# Altium PCB PCB1.pcbdoc
Units mil, origin at the board's own origin, x right, y up, seen from the top; angles counter-clockwise.
Board outline 4437.01 x 4437.01 mil, 4 copper layers (Top Layer, Inner1, Inner2, Bottom Layer); 14 components, 116 nets, 253 pads, 39 vias.
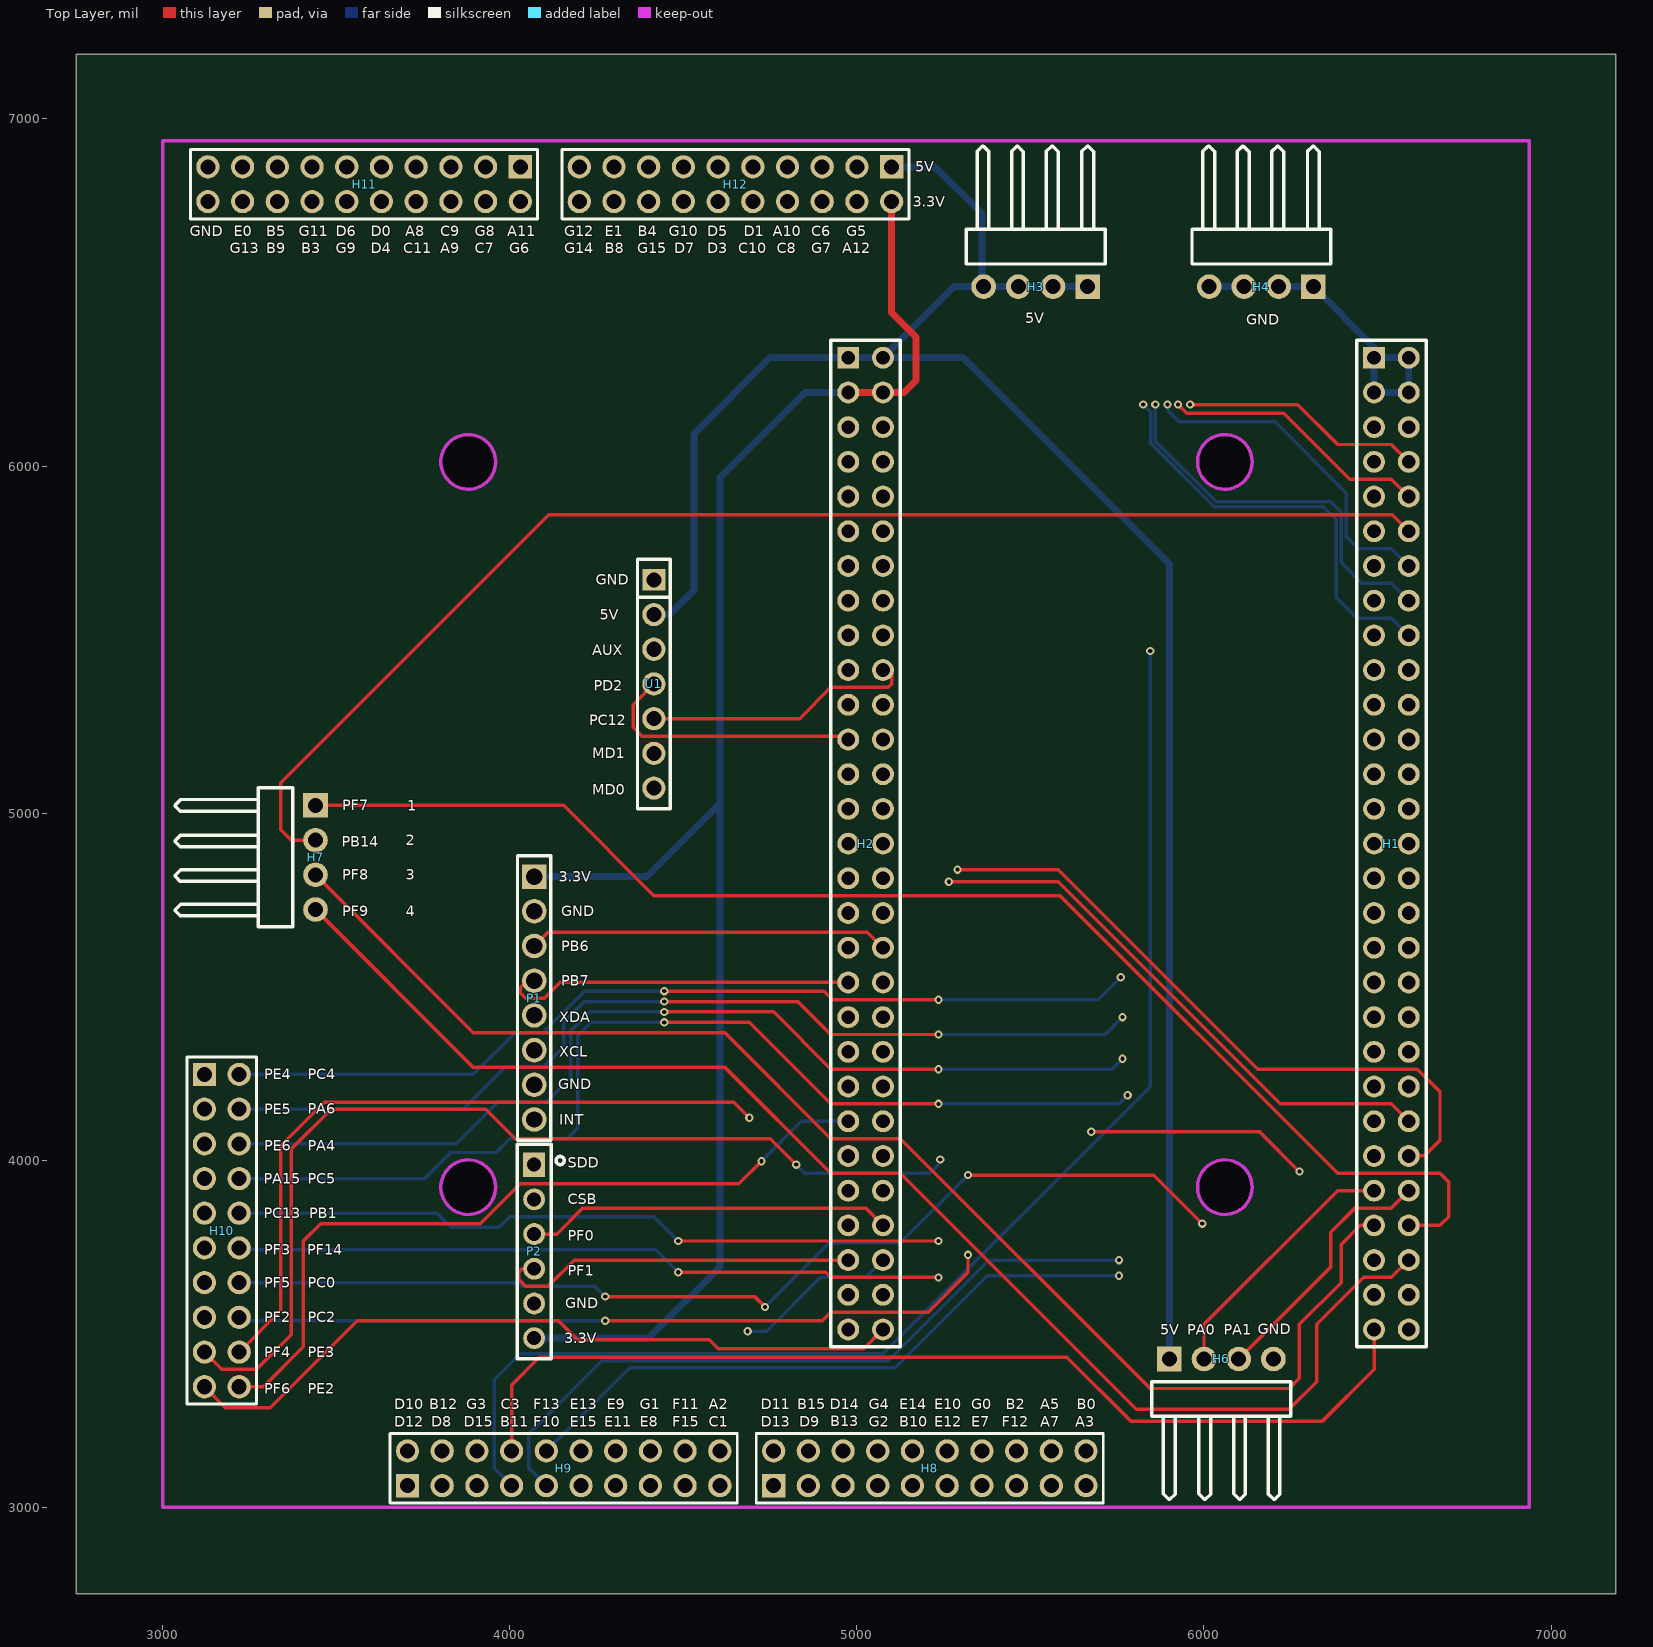
[diagram p0: Top Layer view]
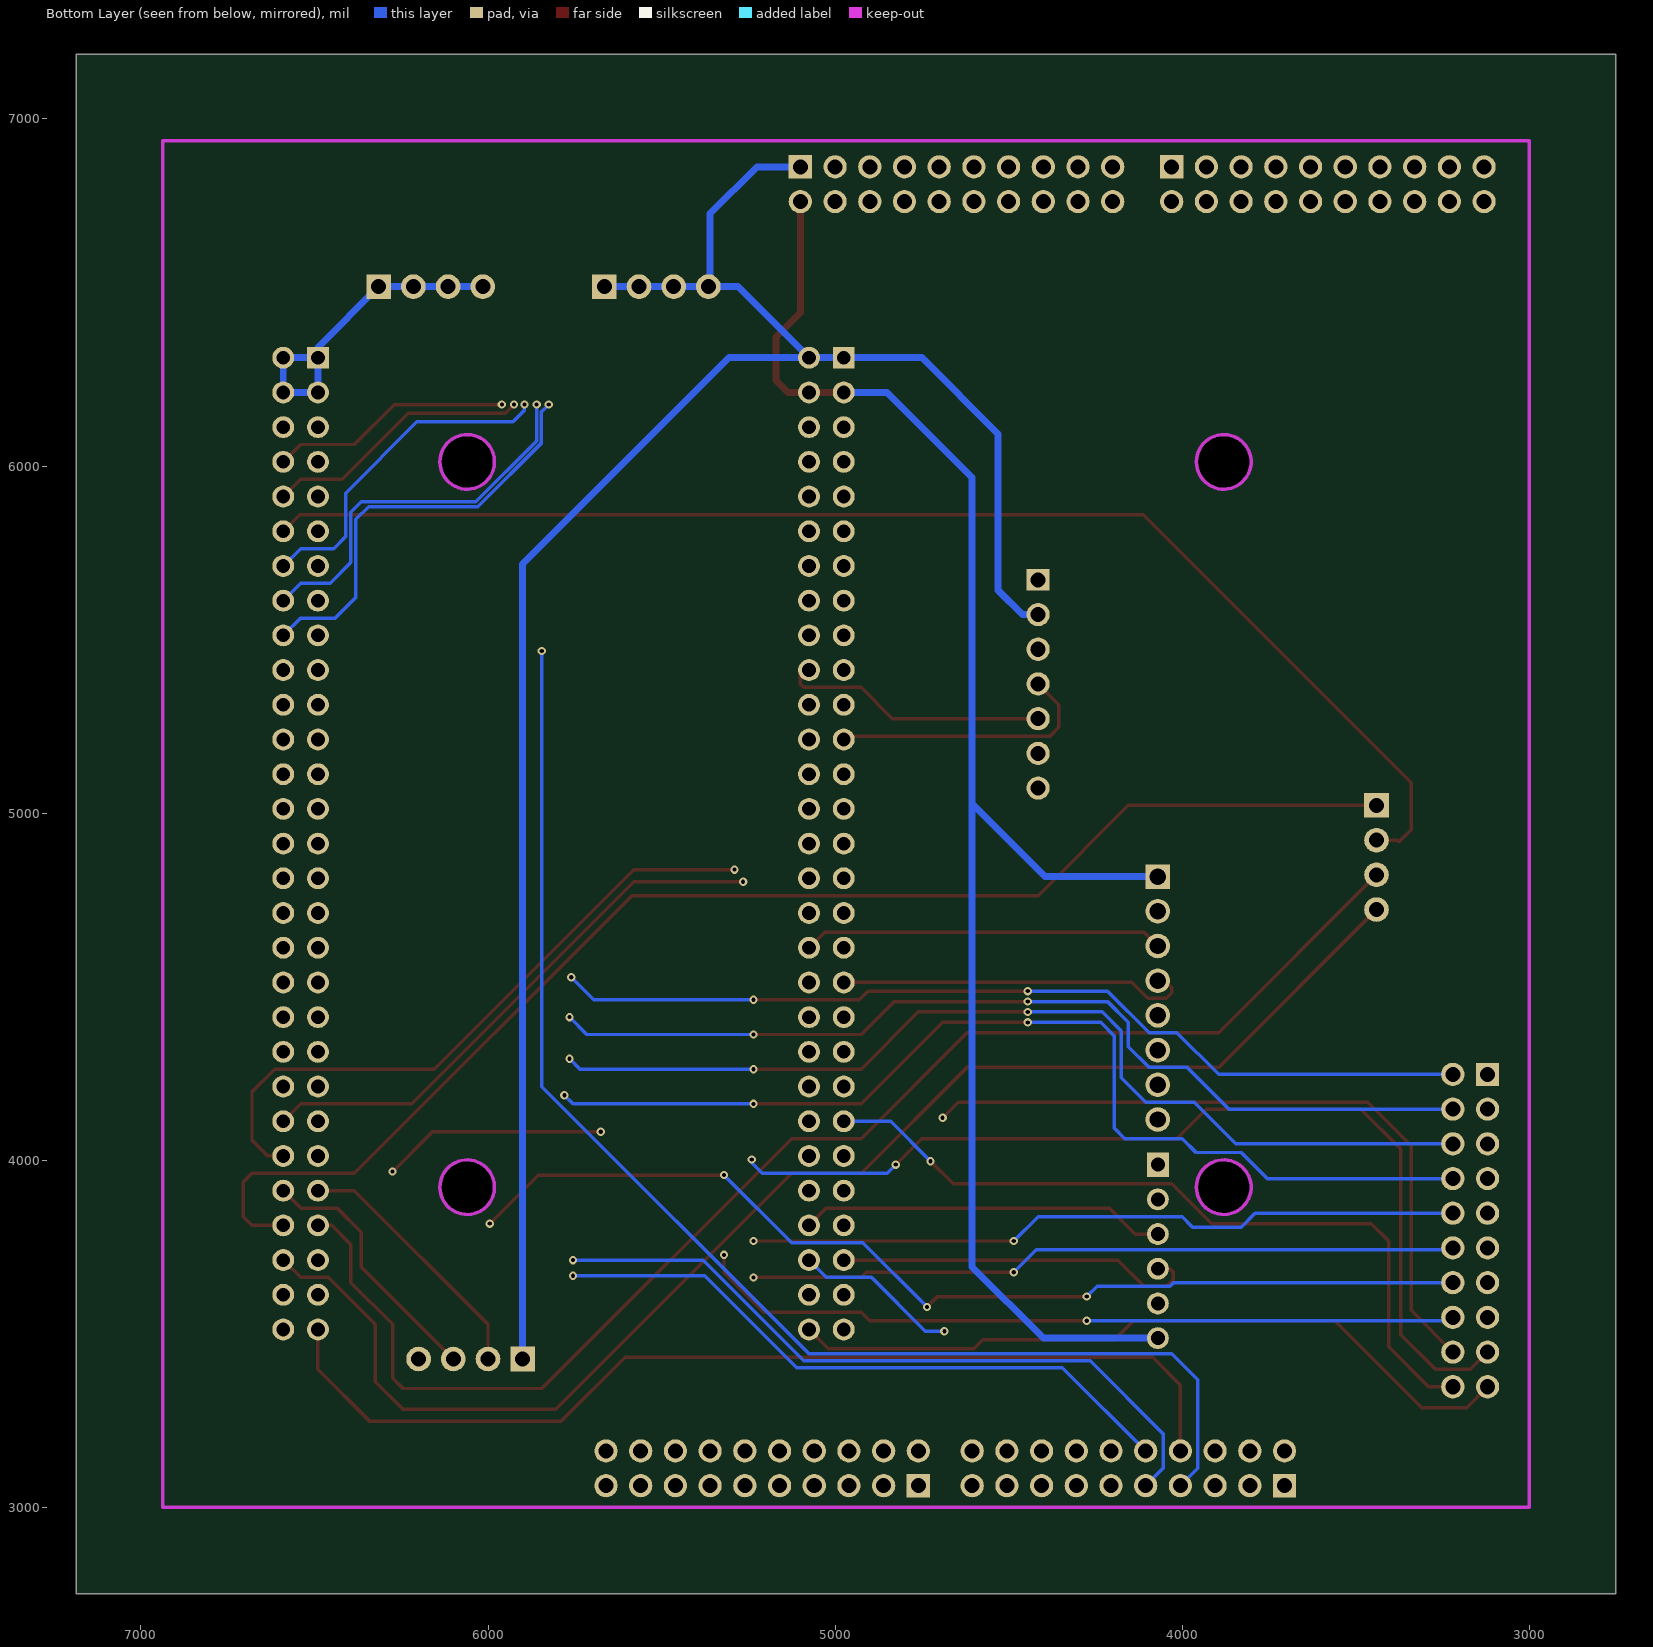
[diagram p1: Bottom Layer view, seen from below]
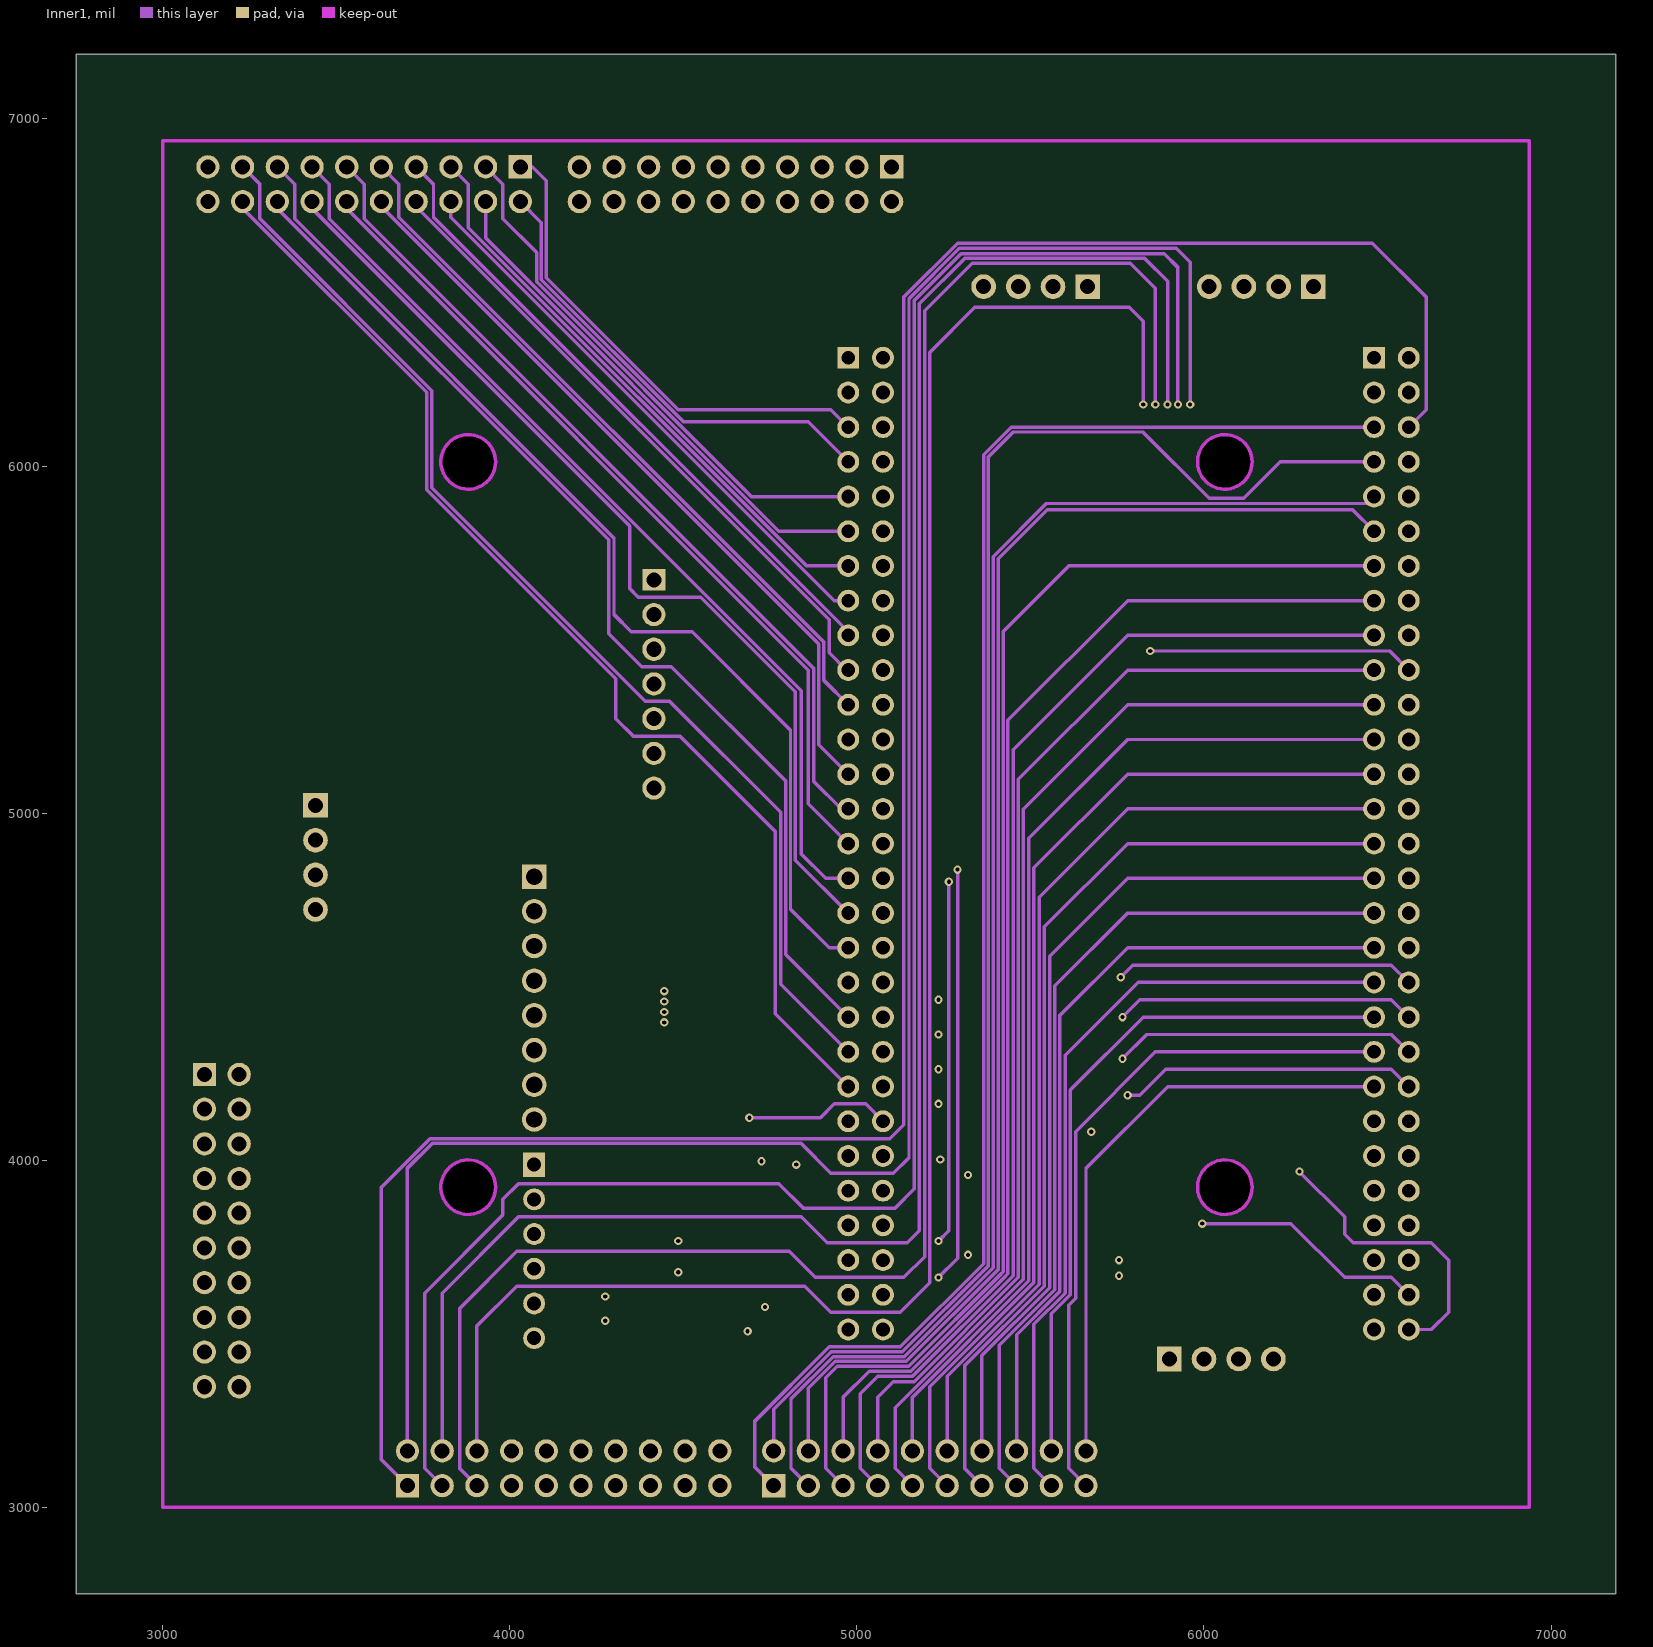
[diagram p2: Inner1]
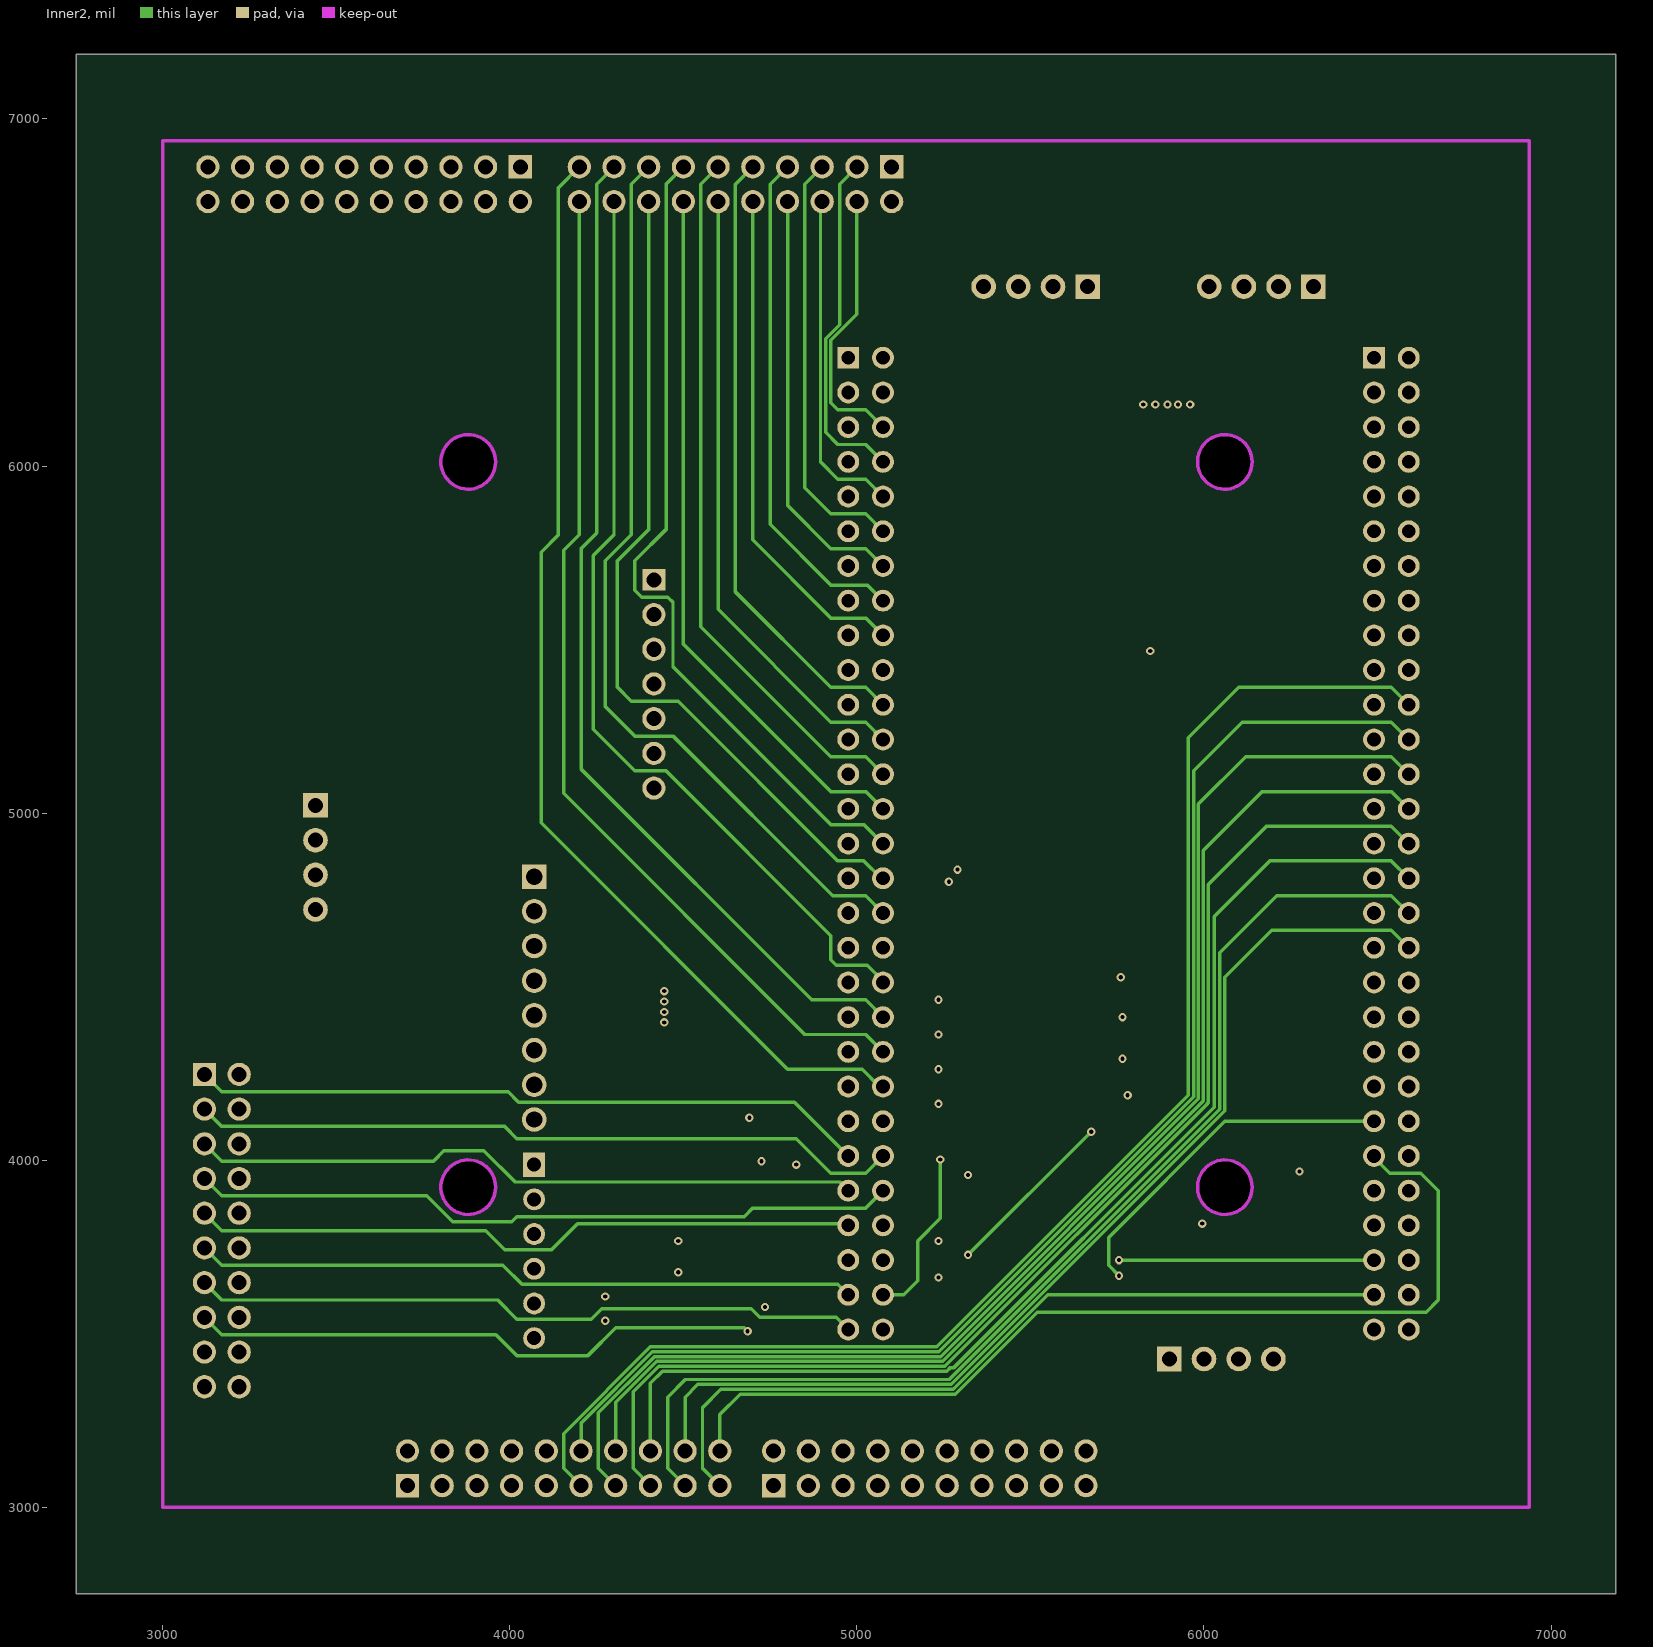
[diagram p3: Inner2]

## Layer stack, top to bottom
Top Layer: signal copper (thickness not stored)
Dielectric: dielectric 12.6, FR-4, Dk 4.8
Inner1: signal copper (thickness not stored)
Dielectric: dielectric 12.6, FR-4, Dk 4.8
Inner2: signal copper (thickness not stored)
Dielectric: dielectric 12.6, FR-4, Dk 4.8
Bottom Layer: signal copper (thickness not stored)

## Board outline
7187.01,2750 2750,2750 2750,7187.01 7187.01,7187.01
cut-out: 3958.74,6012.01 ccw(c3880,6011.88) 3801.26,6012.01 ccw(c3880,6012.13)
cut-out: 6138.74,6012.01 ccw(c6060,6011.88) 5981.26,6012.01 ccw(c6060,6012.13)
cut-out: 3958.74,3922.01 ccw(c3880,3921.88) 3801.26,3922.01 ccw(c3880,3922.13)
cut-out: 6138.74,3922.01 ccw(c6060,3921.88) 5981.26,3922.01 ccw(c6060,3922.13)

## Components (designator, comment, footprint, x,y, rotation, side; value= is the part's Value field where it differs from the comment)
H1 "X5521FV-2x29-C70D30-1000" HDR-TH_58P-P2.54-V-F-R2-C29-S2.54 6540,4912.01 r270 top
H2 "X5521FV-2x29-C70D30-1000" HDR-TH_58P-P2.54-V-F-R2-C29-S2.54 5025,4912.01 r270 top
H3 "PZ254R-11-04P" HDR-TH_4P-P2.54-H-M-W10.4 5515,6517.01 r180 top
H4 "PZ254R-11-04P" HDR-TH_4P-P2.54-H-M-W10.4 6165,6517.01 r180 top
H6 "PZ254R-11-04P" HDR-TH_4P-P2.54-H-M-W10.4 6050,3427.01 r0 top
H7 "PZ254R-11-04P" HDR-TH_4P-P2.54-H-M-W10.4 3440,4872.01 r270 top
H8 "PZ254V-12-20P" HDR-TH_20P-P2.54-V-M-R2-C10-S2.54 5210,3112.01 r0 top
H9 "PZ254V-12-20P" HDR-TH_20P-P2.54-V-M-R2-C10-S2.54 4155,3112.01 r0 top
H10 "PZ254V-12-20P" HDR-TH_20P-P2.54-V-M-R2-C10-S2.54 3170,3797.01 r270 top
H11 "PZ254V-12-20P" HDR-TH_20P-P2.54-V-M-R2-C10-S2.54 3580,6812.01 r180 top
H12 "PZ254V-12-20P" HDR-TH_20P-P2.54-V-M-R2-C10-S2.54 4650,6812.01 r180 top
P1 "2.54-1*8P母环保" HDR-TH_8P-P2.54-V-F-1 4070,4467.01 r270 top
P2 "2.54-1*6P母" HDR-TH_6P-P2.54-V-F 4070,3737.01 r270 top
U1 "PM254-1-07-Z-8.5" HDR-TH_7P-P2.54-V-F 4415,5372.01 r270 top

## Footprints (in the part's own frame and the unit in brackets; to place one, negate y for a bottom-side part, rotate by r counter-clockwise, add the part's x,y. Pads: shape width x height; smd on the part's side, far side on the other; paste and mask are expansions set on the pad)
HDR-TH_4P-P2.54-H-M-W10.4 [mm]
  rect 1.8x1.8 hole 1.1: 1(-3.81,0)
  round 1.8 hole 1.1: 2(-1.27,0) 3(1.27,0) 4(3.81,0)
  silkscreen extent -5.09,-10.27 5.07,-1.65
HDR-TH_6P-P2.54-V-F [mm]
  rect 1.8x1.6 hole 1.02: 1(-6.35,0)
  round 1.6 hole 1.02: 2(-3.81,0) 3(-1.27,0) 4(1.27,0) 5(3.81,0) 6(6.35,0)
  silkscreen extent -7.85,-1.25 7.85,2.2
HDR-TH_7P-P2.54-V-F [mm]
  rect 1.575x1.7 hole 1.1: 1(-7.62,0)
  round 1.7 hole 1.1: 2(-5.08,0) 3(-2.54,0) 4(0,0) 5(2.54,0) 6(5.08,0) 7(7.62,0)
  silkscreen extent -9.13,-1.2 9.13,1.2
HDR-TH_8P-P2.54-V-F-1 [mm]
  rect 1.8x1.8 hole 1.2: 1(-8.89,0)
  round 1.8 hole 1.2: 2(-6.35,0) 3(-3.81,0) 4(-1.27,0) 5(1.27,0) 6(3.81,0) 7(6.35,0) 8(8.89,0)
  silkscreen extent -10.41,-1.22 10.41,1.22
HDR-TH_20P-P2.54-V-M-R2-C10-S2.54 [mm]
  rect 1.7x1.7 hole 1.1: 1(-11.43,-1.27)
  round 1.7 hole 1.1: 2(-11.43,1.27) 3(-8.89,-1.27) 4(-8.89,1.27) 5(-6.35,-1.27) 6(-6.35,1.27) 7(-3.81,-1.27) 8(-3.81,1.27) 9(-1.27,-1.27) 10(-1.27,1.27) 11(1.27,-1.27) 12(1.27,1.27) 13(3.81,-1.27) 14(3.81,1.27) 15(6.35,-1.27) 16(6.35,1.27) 17(8.89,-1.27) 18(8.89,1.27) 19(11.43,-1.27) 20(11.43,1.27)
  silkscreen extent -12.7,-2.54 12.7,2.54
HDR-TH_58P-P2.54-V-F-R2-C29-S2.54 [mm]
  rect 1.6x1.6 hole 1: 1(-35.56,-1.27)
  round 1.6 hole 1: 2(-35.56,1.27) 3(-33.02,-1.27) 4(-33.02,1.27) 5(-30.48,-1.27) 6(-30.48,1.27) 7(-27.94,-1.27) 8(-27.94,1.27) 9(-25.4,-1.27) 10(-25.4,1.27) 11(-22.86,-1.27) 12(-22.86,1.27) 13(-20.32,-1.27) 14(-20.32,1.27) 15(-17.78,-1.27) 16(-17.78,1.27) 17(-15.24,-1.27) 18(-15.24,1.27) 19(-12.7,-1.27) 20(-12.7,1.27) 21(-10.16,-1.27) 22(-10.16,1.27) 23(-7.62,-1.27) 24(-7.62,1.27) 25(-5.08,-1.27) 26(-5.08,1.27) 27(-2.54,-1.27) 28(-2.54,1.27) 29(0,-1.27) 30(0,1.27) 31(2.54,-1.27) 32(2.54,1.27) 33(5.08,-1.27) 34(5.08,1.27) 35(7.62,-1.27) 36(7.62,1.27) 37(10.16,-1.27) 38(10.16,1.27) 39(12.7,-1.27) 40(12.7,1.27) 41(15.24,-1.27) 42(15.24,1.27) 43(17.78,-1.27) 44(17.78,1.27) 45(20.32,-1.27) 46(20.32,1.27) 47(22.86,-1.27) 48(22.86,1.27) 49(25.4,-1.27) 50(25.4,1.27) 51(27.94,-1.27) 52(27.94,1.27) 53(30.48,-1.27) 54(30.48,1.27) 55(33.02,-1.27) 56(33.02,1.27) 57(35.56,-1.27) 58(35.56,1.27)
  silkscreen extent -36.83,-2.54 36.83,2.54

## Via types
v1: diameter 24.02, hole 12.01, Top Layer to Bottom Layer, 39 vias

## Nets (pads, with @x,y where several pads share a name; then routed paths per layer and width w, separated by ;. In a path a pad name is that pad's centre, name@x,y a point inside that pad or via, vN(x,y) a via of type N, cw(c..) or ccw(c..) an arc to the next point about the centre after c; other vN are vias at no path point)
3.3V: H2.3 H2.4 H12.2 P1.1 P2.6 | length 4741.9
  Top Layer w20: H2.3 H2.4 5135,6212.01 5170,6247.01 5170,6372.01 5100,6442.01 H12.2
  Bottom Layer w20: P2.6 4400,3487.01 4605,3692.01 4605,5027.01 ; P1.1 4395,4817.01 4605,5027.01 ; H2.3 4850,6212.01 4605,5967.01 4605,5027.01
5V: H2.1 H2.2 H3.1 H3.2 H3.3 H3.4 H6.1 H12.1 U1.2 | length 5794.5
  Bottom Layer w20: U1.2 4460,5572.01 4530,5642.01 4530,6092.01 4750,6312.01 H2.1 H2.2 ; H12.1 5225,6862.01 5360,6727.01 5360,6522.01 H3.4 ; H3.1 5280,6517.01 H2.2 ; H6.1 5900,5717.01 5305,6312.01 H2.2
AUX: U1.3
BLDC1_PF7: H1.52 H7.1 | length 3939.8
  Top Layer w10: H7.1 4155,5022.01 4415,4762.01 5585,4762.01 6385,3962.01 6680,3962.01 6705,3937.01 6705,3837.01 6680,3812.01 H1.52
BLDC2_PB14: H1.12 H7.2 | length 3841.2
  Top Layer w10: H7.2 3380,4922.01 3375,4917.01 3340,4952.01 3340,5087.01 4112.47,5859.48 6542.53,5859.48 H1.12
BLDC3_PF8: H1.51 H7.3 | length 4012.9
  Top Layer w10: H7.3 3895,4367.01 4620,4367.01 4925,4062.01 5125,4062.01 5845,3342.01 6245,3342.01 6275,3372.01 6275,3527.01 6395,3647.01 6395,3757.01 6450,3812.01 H1.51
BLDC4_PF9: H1.54 H7.4 | length 4021.2
  Top Layer w10: H7.4 3895,4267.01 4620,4267.01 4925,3962.01 5125,3962.01 5805,3282.01 6245,3282.01 6325,3362.01 6325,3527.01 6460,3662.01 6540,3662.01 H1.54
BMP280_SCL_PF1: H2.53 P2.4 | length 1058.5
  Top Layer w10: P2.4 4035,3687.01 4025,3677.01 4025,3657.01 4045,3637.01 4110,3637.01 4185,3712.01 H2.53
BMP280_SDA_PF0: H2.52 P2.3 | length 1056.8
  Top Layer w10: P2.3 4135,3787.01 4210,3862.01 5025,3862.01 H2.52
GND: H1.1 H1.2 H1.3 H1.4 H4.1 H4.2 H4.3 H4.4 H6.4 H11.19 H11.20 P1.2 P1.7 P2.1 P2.2 P2.5 U1.1 U1.6 | length 953.5
  Bottom Layer w20: H4.4 H4.1 6490,6342.01 H1.1 ; H1.4 H1.3 H1.1 ; H1.4@6590,6236 H1.2 H1.1
INT: P1.8
LORA_RX_PC12: H2.20 U1.5 | length 785.6
  Top Layer w10: U1.5 4835,5272.01 4925,5362.01 5090,5362.01 5100,5372.01 5100,5402.01 5090,5412.01 H2.20
LORA_TX_PD2: H2.23 U1.4 | length 784.4
  Top Layer w10: U1.4 4355,5312.01 4355,5247.01 4380,5222.01 4965,5222.01 H2.23
MD0: U1.7
MPU6050_SCL_PB6: H2.36 P1.3 | length 1040.2
  Top Layer w10: P1.3 4110,4657.01 5030,4657.01 H2.36
MPU6050_SDA_PB7: H2.37 P1.4 | length 1033.9
  Top Layer w10: P1.4 4050,4517.01 4030,4497.01 4030,4482.01 4045.88,4466.13 4099.12,4466.13 4145,4512.01 H2.37
PA2: H1.47 H9.20 | length 2856
  Inner2 w10: H9.20 4605,3267.01 4663.86,3325.87 5283.86,3325.87 5520,3562.01 6640,3562.01 6675,3597.01 6675,3912.01 6625,3962.01 6535,3962.01 6490,4007.01 H1.47
PA3: H1.41 H8.19 | length 2004.3
  Inner1 w10: H8.19 5610,3112.01 5610,3582.01 5630,3602.01 5630,4082.01 5860,4312.01 H1.41
PA4: H1.42 H10.6 | length 3737
  Top Layer w10: v1(4445,4427.01) 4760,4427.01 4925,4262.01 v1(5235,4262.01)
  Inner1 w10: v1(5765,4292.01) 5835,4362.01 6540,4362.01 H1.42
  Bottom Layer w10: H10.6 3845,4047.01 3965,4167.01 4105,4167.01 4175,4237.01 4175,4372.01 4230,4427.01 v1(4445,4427.01) ; v1(5235,4262.01) 5735,4262.01 v1(5765,4292.01)
PA5: H1.39 H8.18 | length 2024.8
  Inner1 w10: H8.18 5560,3557.01 5615,3612.01 5615,4202.01 5825,4412.01 H1.39
PA6: H1.40 H10.4 | length 3640.9
  Top Layer w10: v1(4445,4457.01) 4830,4457.01 4925,4362.01 v1(5235,4362.01)
  Inner1 w10: v1(5765,4412.01) 5815,4462.01 6540,4462.01 H1.40
  Bottom Layer w10: H10.4 3865,4147.01 3985,4267.01 4095,4267.01 4155,4327.01 4155,4397.01 4215,4457.01 v1(4445,4457.01) ; v1(5235,4362.01) 5715,4362.01 v1(5765,4412.01)
PA7: H1.37 H8.17 | length 2275
  Inner1 w10: H8.17 5510,3112.01 5510,3527.01 5600,3617.01 5600,4302.01 5810,4512.01 H1.37
PA8: H2.17 H11.7 | length 1865.7
  Inner1 w10: H11.7 3780,6812.01 3780,6717.01 4975,5522.01 H2.17
PA9: H2.15 H11.6 | length 1647.7
  Inner1 w10: H11.6 3830,6717.01 4935,5612.01 H2.15
PA10: H2.16 H12.7 | length 1466.8
  Inner2 w10: H12.7 4750,6812.01 4750,5832.01 4925,5657.01 5030,5657.01 H2.16
PA11: H2.5 H11.1 | length 1419.7
  Inner1 w10: H11.1 4065,6862.01 4105,6822.01 4105,6542.01 4485,6162.01 4925,6162.01 H2.5
PA12: H2.6 H12.4 | length 790.1
  Inner2 w10: H12.4 5000,6437.01 4925,6362.01 4925,6182.01 4945,6162.01 5025,6162.01 H2.6
PA15: H2.50 H10.7 | length 2044.1
  Inner2 w10: H10.7 3170,3897.01 3760,3897.01 3835,3822.01 4005,3822.01 4020,3837.01 4675,3837.01 4700,3862.01 5025,3862.01 H2.50
PB0: H1.43 H8.20 | length 1742.3
  Inner1 w10: H8.20 5660,3977.01 5895,4212.01 H1.43
PB1: H1.46 H10.10 | length 4731.2
  Top Layer w10: v1(4485,3767.01) v1(5235,3767.01) ; v1(5265,4802.01) 5580,4802.01 6220,4162.01 6540,4162.01 H1.46
  Inner1 w10: v1(5235,3767.01) 5265,3797.01 v1(5265,4802.01)
  Bottom Layer w10: H10.10 3790,3847.01 3830,3807.01 3970,3807.01 4000,3837.01 4415,3837.01 v1(4485,3767.01)
PB2: H1.35 H8.16 | length 2292.5
  Inner1 w10: H8.16 5460,3497.01 5585,3622.01 5585,4417.01 5780,4612.01 H1.35
PB3: H2.33 H11.14 | length 2795.5
  Inner1 w10: H11.14 3430,6742.01 4345,5827.01 4345,5647.01 4370,5622.01 4550.18,5622.01 4822.59,5349.6 4822.59,4864.42 H2.33
PB4: H2.34 H12.15 | length 2653.2
  Inner2 w10: H12.15 4350,6812.01 4350,5802.01 4275,5727.01 4275,5307.01 4360,5222.01 4470,5222.01 4930,4762.01 5025,4762.01 H2.34
PB5: H2.35 H11.15 | length 3066.1
  Inner1 w10: H11.15 3380,6812.01 3380,6712.01 4300,5792.01 4300,5572.01 4350,5522.01 4525,5522.01 4808.57,5238.43 4808.57,4723.43 4920,4612.01 H2.35
PB8: H2.38 H12.18 | length 2726.2
  Inner2 w10: H12.18 4300,5802.01 4240,5742.01 4240,5242.01 4360,5122.01 4450,5122.01 4925,4647.01 4925,4577.01 4940,4562.01 5030,4562.01 5075,4517.01 H2.38
PB9: H2.39 H11.16 | length 3081.2
  Inner1 w10: H11.16 3330,6742.01 4285,5787.01 4285,5517.01 4380,5422.01 4465,5422.01 4794.56,5092.45 4794.56,4592.45 H2.39
PB10: H1.21 H8.9 | length 3258.2
  Inner1 w10: H8.9 5110,3112.01 5110,3287.01 5475,3652.01 5475,3652.19 5479.02,3656.2 5479.02,5011.02 5780,5312.01 H1.21
PB11: H1.20 H9.7 | length 4588.5
  Inner1 w10: v1(5845,5467.01) 6535,5467.01 H1.20
  Bottom Layer w10: H9.7 3955,3112.01 3955,3367.01 4030,3442.01 5075,3442.01 5845,4212.01 v1(5845,5467.01)
PB12: H1.14 H9.4 | length 6759.1
  Inner1 w10: H9.4 3805,3617.01 4025,3837.01 4840,3837.01 4915,3762.01 5145,3762.01 5180,3797.01 5180,6467.01 5310.98,6597.99 5829.02,6597.99 5895,6532.01 v1(5895,6177.01)
  Bottom Layer w10: v1(5895,6177.01) 5895,6160 5927.99,6127.01 6205,6127.01 6410,5922.01 6410,5797.01 6445,5762.01 6540,5762.01 H1.14
PB13: H1.13 H8.5 | length 3961.2
  Inner1 w10: H8.5 4910,3112.01 4910,3372.72 4943.22,3405.95 5148.94,3405.95 5415,3672.01 5415,3672.72 5421.06,3678.79 5421.06,5523.07 5610,5712.01 H1.13
PB15: H1.11 H8.4 | length 4085.1
  Inner1 w10: H8.4 4860,3342.54 4937.42,3419.96 5137.95,3419.96 5138.02,3420.03 5142.42,3419.96 5405,3682.54 5405,3683.1 5407.05,3684.59 5407.05,5733.17 5547.94,5874.07 6427.94,5874.07 H1.11
PC0: H1.56 H10.14 | length 3699.3
  Top Layer w10: v1(4275,3607.01) 4705,3607.01 v1(4735,3577.01) ; v1(5320,3957.01) 5855,3957.01 v1(5995,3817.01)
  Inner1 w10: v1(5995,3817.01) 6250,3817.01 6405,3662.01 6540,3662.01 H1.56
  Bottom Layer w10: H10.14 4025,3647.01 4035,3637.01 4245,3637.01 v1(4275,3607.01) ; v1(4735,3577.01) 4920,3762.01 5125,3762.01 v1(5320,3957.01)
PC1: H1.55 H9.19 | length 2315.3
  Inner2 w10: H9.19 4555,3112.01 4555,3287.01 4607.87,3339.88 5277.87,3339.88 5550,3612.01 H1.55
PC2: H1.58 H10.16 | length 4212.4
  Top Layer w10: v1(4275,3537.01) 4900,3537.01 4925,3562.01 5205,3562.01 5320,3677.01 v1(5320,3727.01) ; v1(5675,4082.01) 6160,4082.01 v1(6275,3967.01)
  Inner1 w10: v1(6275,3967.01) 6405,3837.01 6405,3787.01 6430,3762.01 6655,3762.01 6705,3712.01 6705,3562.01 6655,3512.01 H1.58
  Inner2 w10: v1(5320,3727.01) v1(5675,4082.01)
  Bottom Layer w10: H10.16 3230,3537.01 v1(4275,3537.01)
PC3: H1.57 H9.8 | length 2961.9
  Top Layer w10: H9.8 4005,3352.01 4085,3432.01 5605,3432.01 5790,3247.01 6340,3247.01 6490,3397.01 H1.57
PC4: H1.38 H10.2 | length 3541.9
  Top Layer w10: v1(4445,4487.01) 4905,4487.01 4930,4462.01 v1(5235,4462.01)
  Inner1 w10: v1(5760,4527.01) 5795,4562.01 6540,4562.01 H1.38
  Bottom Layer w10: H10.2 3895,4247.01 4015,4367.01 4095,4367.01 4215,4487.01 v1(4445,4487.01) ; v1(5235,4462.01) 5695,4462.01 v1(5760,4527.01)
PC5: H1.44 H10.8 | length 3871.1
  Top Layer w10: v1(4445,4397.01) 4690,4397.01 4925,4162.01 v1(5235,4162.01)
  Inner1 w10: v1(5780,4187.01) 5815,4187.01 5890,4262.01 6540,4262.01 H1.44
  Bottom Layer w10: H10.8 3755,3947.01 3830,4022.01 3960,4022.01 4000,4062.01 4165,4062.01 4195,4092.01 4195,4357.01 4235,4397.01 v1(4445,4397.01) ; v1(5235,4162.01) 5755,4162.01 v1(5780,4187.01)
PC6: H2.12 H12.5 | length 1222.5
  Inner2 w10: H12.5 4850,6812.01 4850,5937.01 4925,5862.01 5025,5862.01 H2.12
PC7: H2.11 H11.4 | length 1500
  Inner1 w10: H11.4 3930,6657.01 4775,5812.01 H2.11
PC8: H2.14 H12.8 | length 1222.5
  Inner2 w10: H12.8 4800,5887.01 4925,5762.01 5025,5762.01 H2.14
PC9: H2.13 H11.5 | length 1694.6
  Inner1 w10: H11.5 3880,6812.01 3880,6687.01 4855,5712.01 H2.13
PC10: H2.18 H12.10 | length 1463.9
  Inner2 w10: H12.10 4700,5787.01 4925,5562.01 5025,5562.01 H2.18
PC11: H2.19 H11.8 | length 1868.6
  Inner1 w10: H11.8 3730,6747.01 4920,5557.01 4920,5462.01 4970,5412.01 H2.19
PC13: H2.51 H10.9 | length 1931.6
  Inner2 w10: H10.9 3170,3797.01 3930,3797.01 3985,3742.01 4120,3742.01 4195,3817.01 4970,3817.01 H2.51
PD0: H2.21 H11.9 | length 2107.1
  Inner1 w10: H11.9 3680,6812.01 3680,6717.01 4905,5492.01 4905,5382.01 H2.21
PD1: H2.22 H12.9 | length 1805.3
  Inner2 w10: H12.9 4650,6812.01 4650,5637.01 4925,5362.01 5025,5362.01 H2.22
PD3: H2.24 H12.12 | length 1805.3
  Inner2 w10: H12.12 4600,5587.01 4925,5262.01 5025,5262.01 H2.24
PD4: H2.25 H11.10 | length 2207.1
  Inner1 w10: H11.10 3630,6747.01 4890,5487.01 4890,5197.01 H2.25
PD5: H2.26 H12.11 | length 2046.8
  Inner2 w10: H12.11 4550,6812.01 4550,5537.01 4925,5162.01 5025,5162.01 H2.26
PD6: H2.27 H11.11 | length 2460.3
  Inner1 w10: H11.11 3580,6812.01 3580,6712.01 4875,5417.01 4875,5092.01 4955,5012.01 H2.27
PD7: H2.28 H12.14 | length 2046.8
  Inner2 w10: H12.14 4500,5487.01 4925,5062.01 5025,5062.01 H2.28
PD8: H1.10 H9.3 | length 6756.6
  Top Layer w10: v1(5925,6177.01) 5950,6152.01 6230,6152.01 6420,5962.01 6540,5962.01 H1.10
  Inner1 w10: H9.3 3755,3112.01 3755,3617.01 3980,3842.01 3980,3887.01 4025,3932.01 4775,3932.01 4845,3862.01 5110,3862.01 5165,3917.01 5165,6477.01 5300,6612.01 5885,6612.01 5925,6572.01 v1(5925,6177.01)
PD9: H1.9 H8.3 | length 4227.9
  Inner1 w10: H8.3 4810,3112.01 4810,3312.37 4931.61,3433.98 5136.61,3433.98 5393.03,3690.4 5393.03,5738.98 5546.06,5892.01 6470,5892.01 H1.9
PD10: H1.8 H9.2 | length 6813.7
  Top Layer w10: v1(5960,6177.01) 6270,6177.01 6385,6062.01 6540,6062.01 H1.8
  Inner1 w10: H9.2 3705,3977.19 3775.81,4047.99 4839.02,4047.99 4925,3962.01 5105,3962.01 5150,4007.01 5150,6482.01 5295,6627.01 5920,6627.01 5960,6587.01 v1(5960,6177.01)
PD11: H1.7 H8.2 | length 4504
  Inner1 w10: H8.2 4760,3282.19 4925.81,3447.99 5130.81,3447.99 5379.02,3696.2 5379.02,6026.2 5450.81,6097.99 5824.02,6097.99 6015,5907.01 6115,5907.01 6220,6012.01 H1.7
PD12: H1.6 H9.1 | length 6884.7
  Inner1 w10: H9.1 3630,3137.01 3630,3922.01 3770,4062.01 5095,4062.01 5135,4102.01 5135,6487.01 5290,6642.01 6485,6642.01 6640,6487.01 6640,6162.01 H1.6
PD13: H1.5 H8.1 | length 4544.4
  Inner1 w10: H8.1 4705,3117.01 4705,3247.01 4920,3462.01 5125,3462.01 5365,3702.01 5365,6032.01 5445,6112.01 H1.5
PD14: H1.15 H8.6 | length 3569.8
  Inner1 w10: H8.6 4960,3317.01 5034.92,3391.93 5154.74,3391.93 5429.02,3666.2 5429.02,3666.92 5435.08,3672.98 5435.08,5267.09 5780,5612.01 H1.15
PD15: H1.16 H9.5 | length 6917
  Inner1 w10: H9.5 3855,3112.01 3855,3572.01 4020,3737.01 4805,3737.01 4880,3662.01 5135,3662.01 5195,3722.01 5195,6447.01 5331.97,6583.98 5788.03,6583.98 5860,6512.01 v1(5860,6177.01)
  Bottom Layer w10: v1(5860,6177.01) 5860,6072.01 6035,5897.01 6365,5897.01 6395,5867.01 6395,5722.01 6455,5662.01 6540,5662.01 H1.16
PE0: H2.41 H11.17 | length 3313.8
  Inner1 w10: H11.17 3280,6812.01 3280,6712.01 3775,6217.01 3775,5937.01 4390,5322.01 4460,5322.01 4780,5002.01 4780,4507.01 H2.41
PE1: H2.40 H12.17 | length 2940.5
  Inner2 w10: H12.17 4250,6812.01 4250,5807.01 4205,5762.01 4205,5127.01 4870,4462.01 5025,4462.01 H2.40
PE2: H2.45 H10.20 | length 2250.5
  Top Layer w10: H10.20 3290,3347.01 3405,3462.01 3405,3767.01 3455,3817.01 3915,3817.01 4030,3932.01 4660,3932.01 v1(4725,3997.01)
  Bottom Layer w10: v1(4725,3997.01) 4840,4112.01 H2.45
PE3: H2.46 H10.18 | length 2487.4
  Top Layer w10: H10.18 3340,3567.01 3340,4042.01 3465,4167.01 4645,4167.01 v1(4690,4122.01)
  Inner1 w10: v1(4690,4122.01) 4895,4122.01 4935,4162.01 5025,4162.01 H2.46
PE4: H2.47 H10.1 | length 1952.3
  Inner2 w10: H10.1 3170,4197.01 3995,4197.01 4025,4167.01 4820,4167.01 H2.47
PE5: H2.48 H10.3 | length 2052.3
  Inner2 w10: H10.3 3170,4097.01 3985,4097.01 4020,4062.01 4825,4062.01 4925,3962.01 5025,3962.01 H2.48
PE6: H2.49 H10.5 | length 1935.8
  Inner2 w10: H10.5 3170,3997.01 3780,3997.01 3810,4027.01 3925,4027.01 4015,3937.01 4950,3937.01 H2.49
PE7: H1.29 H8.13 | length 2775.4
  Inner1 w10: H8.13 5310,3112.01 5310,3407.01 5540,3637.01 5540,4672.01 5780,4912.01 H1.29
PE8: H1.30 H9.15 | length 3590.7
  Inner2 w10: H9.15 4355,3112.01 4355,3332.19 4428.76,3405.95 5248.94,3405.95 5249.03,3406.04 5253.13,3405.85 6010,4162.72 6010,4163.28 6012.05,4164.59 6012.05,4794.06 6180,4962.01 6540,4962.01 H1.30
PE9: H1.28 H9.14 | length 3597.4
  Inner2 w10: H9.14 4305,3302.01 4422.95,3419.96 5242.95,3419.96 5243.02,3420.03 5247.42,3419.96 5995,4167.54 5995,4167.68 5998.03,4170.58 5998.03,4892.01 6168.03,5062.01 6540,5062.01 H1.28
PE10: H1.27 H8.12 | length 2775.4
  Inner1 w10: H8.12 5260,3377.54 5525,3642.54 5525,4757.01 5780,5012.01 H1.27
PE11: H1.26 H9.13 | length 3867.2
  Inner2 w10: H9.13 4255,3112.01 4255,3272.37 4416.61,3433.98 5241.61,3433.98 5984.02,4176.38 5984.02,5026.02 6120,5162.01 6540,5162.01 H1.26
PE12: H1.25 H8.11 | length 3016.8
  Inner1 w10: H8.11 5210,3112.01 5210,3347.37 5510,3647.37 5510,4842.01 5780,5112.01 H1.25
PE13: H1.24 H9.12 | length 3873.1
  Inner2 w10: H9.12 4205,3242.19 4410.81,3447.99 5235.81,3447.99 5970,4182.19 5970,5122.01 6110,5262.01 6540,5262.01 H1.24
PE14: H1.23 H8.10 | length 3016.8
  Inner1 w10: H8.10 5160,3317.19 5495,3652.19 5495,4927.01 5780,5212.01 H1.23
PE15: H1.22 H9.11 | length 4120.3
  Inner2 w10: H9.11 4155,3112.01 4155,3212.01 4405,3462.01 5230,3462.01 5955,4187.01 5955,5217.01 6100,5362.01 6540,5362.01 H1.22
PF2: H2.54 H10.15 | length 2122.8
  Inner2 w10: H10.15 3170,3497.01 3960,3497.01 4020,3437.01 4225,3437.01 4305,3517.01 4675,3517.01 v1(4685,3507.01)
  Bottom Layer w10: v1(4685,3507.01) 4740,3507.01 4895,3662.01 5025,3662.01 H2.54
PF3: H2.55 H10.11 | length 1910.9
  Inner2 w10: H10.11 3170,3697.01 3980,3697.01 4035,3642.01 4945,3642.01 H2.55
PF4: H2.56 H10.17 | length 3357.3
  Top Layer w10: H10.17 3170,3397.01 3270,3397.01 3370,3497.01 3370,4032.01 3485,4147.01 3930,4147.01 4015,4062.01 4750,4062.01 v1(4825,3987.01)
  Inner2 w10: H2.56 5135,3612.01 5175,3652.01 5175,3767.01 5240,3832.01 v1(5240,4002.01)
  Bottom Layer w10: v1(4825,3987.01) 4850,3962.01 5210,3962.01 5240,3992.01 v1(5240,4002.01)
PF5: H2.57 H10.13 | length 1935.8
  Inner2 w10: H10.13 3170,3597.01 3965,3597.01 4020,3542.01 4235,3542.01 4265,3572.01 4695,3572.01 4720,3547.01 4940,3547.01 H2.57
PF6: H2.58 H10.19 | length 2139.3
  Top Layer w10: H10.19 3180,3287.01 3310,3287.01 3560,3537.01 4140,3537.01 4195,3482.01 4575,3482.01 4600,3457.01 5020,3457.01 H2.58
PF10: H1.53 H9.9 | length 2812.8
  Inner2 w10: v1(5755,3712.01) H1.53
  Bottom Layer w10: H9.9 4055,3112.01 4055,3212.01 4265,3422.01 5090,3422.01 5380,3712.01 v1(5755,3712.01)
PF11: H1.36 H9.18 | length 3043.3
  Inner2 w10: H9.18 4505,3317.01 4541.89,3353.9 5271.71,3353.9 6060,4142.19 6060,4527.01 6195,4662.01 6540,4662.01 H1.36
PF12: H1.33 H8.15 | length 2534
  Inner1 w10: H8.15 5410,3112.01 5410,3467.01 5570,3627.01 5570,4502.01 5780,4712.01 H1.33
PF13: H1.45 H9.10 | length 2885.4
  Inner2 w10: v1(5755,3667.01) 5725,3697.01 5725,3777.01 6060,4112.01 H1.45
  Bottom Layer w10: H9.10 4345,3402.01 5110,3402.01 5375,3667.01 v1(5755,3667.01)
PF14: H1.48 H10.12 | length 5151.7
  Top Layer w10: v1(4485,3677.01) 4910,3677.01 4925,3662.01 v1(5235,3662.01) ; v1(5290,4837.01) 5580,4837.01 6155,4262.01 6615,4262.01 6680,4197.01 6680,4057.01 6635,4012.01 H1.48
  Inner1 w10: v1(5235,3662.01) 5290,3717.01 v1(5290,4837.01)
  Bottom Layer w10: H10.12 3225,3742.01 4420,3742.01 v1(4485,3677.01)
PF15: H1.34 H9.17 | length 3293.6
  Inner2 w10: H9.17 4455,3112.01 4455,3317.01 4505.91,3367.91 5265.91,3367.91 6045,4147.01 6045,4597.01 6210,4762.01 6540,4762.01 H1.34
PG0: H1.31 H8.14 | length 2534
  Inner1 w10: H8.14 5360,3437.01 5555,3632.01 5555,4587.01 5780,4812.01 H1.31
PG1: H1.32 H9.16 | length 3345.8
  Inner2 w10: H9.16 4405,3357.01 4439.92,3391.93 ; 4440,3391.93 5249.92,3391.93 ; 5249.96,3391.97 5258.66,3391.57 5269.55,3402.45 5279.55,3402.45 6030,4152.9 6030,4702.01 6190,4862.01 6540,4862.01 H1.32
PG2: H1.17 H8.7 | length 3558.2
  Inner1 w10: H8.7 5010,3112.01 5010,3327.01 5060,3377.01 5160,3377.01 5450,3667.01 5450,5182.01 5780,5512.01 H1.17
PG3: H1.18 H9.6 | length 6609.2
  Inner1 w10: H9.6 3905,3522.01 4020,3637.01 4850,3637.01 4925,3562.01 5125,3562.01 5210,3647.01 5210,6327.01 5340,6457.01 5785,6457.01 5825,6417.01 v1(5825,6177.01)
  Bottom Layer w10: v1(5825,6177.01) 5845.98,6156.02 5845.98,6066.2 6029.19,5882.99 6344.02,5882.99 6380.98,5846.02 6380.98,5621.02 6440,5562.01 6540,5562.01 H1.18
PG4: H1.19 H8.8 | length 3293.4
  Inner1 w10: H8.8 5060,3317.01 5105,3362.01 5165,3362.01 5465,3662.01 5465,5097.01 5780,5412.01 H1.19
PG5: H2.8 H12.3 | length 1002.5
  Inner2 w10: H12.3 4950,6812.01 4950,6407.01 4910,6367.01 4910,6097.01 4945,6062.01 5025,6062.01 H2.8
PG6: H2.7 H11.2 | length 1352.2
  Inner1 w10: H11.2 4090.98,6701.02 4090.98,6536.2 4500.18,6127.01 4860,6127.01 H2.7
PG7: H2.10 H12.6 | length 973.5
  Inner2 w10: H12.6 4895,6757.01 4895,6012.01 4945,5962.01 5025,5962.01 H2.10
PG8: H2.9 H11.3 | length 1546.7
  Inner1 w10: H11.3 3980,6812.01 3980,6712.01 4076.97,6615.04 4076.97,6530.4 4695.36,5912.01 H2.9
PG9: H2.29 H11.12 | length 2448.5
  Inner1 w10: H11.12 3530,6742.01 4860,5412.01 4860,5027.01 H2.29
PG10: H2.30 H12.13 | length 2403.7
  Inner2 w10: H12.13 4450,6812.01 4450,5817.01 4360,5727.01 4360,5642.01 4380,5622.01 4455,5622.01 4470,5607.01 4470,5422.01 4925,4967.01 5020,4967.01 H2.30
PG11: H2.31 H11.13 | length 2728
  Inner1 w10: H11.13 3480,6812.01 3480,6712.01 4840,5352.01 4840,4882.01 4910,4812.01 H2.31
PG12: H2.44 H12.19 | length 3235.4
  Inner2 w10: H12.19 4140,6802.01 4140,5802.01 4090,5752.01 4090,4972.01 4800,4262.01 5015,4262.01 5065,4212.01 H2.44
PG13: H2.43 H11.18 | length 3351.9
  Inner1 w10: H11.18 3230,6742.01 3760,6212.01 3760,5932.01 4305,5387.01 4305,5272.01 4355,5222.01 4490,5222.01 4765,4947.01 4765,4422.01 H2.43
PG14: H2.42 H12.20 | length 2952.2
  Inner2 w10: H12.20 4200,5802.01 4155,5757.01 4155,5057.01 4850,4362.01 5025,4362.01 H2.42
PG15: H2.32 H12.16 | length 2430.1
  Inner2 w10: H12.16 4400,5817.01 4310,5727.01 4310,5362.01 4350,5322.01 4485,5322.01 4945,4862.01 5020,4862.01 5070,4812.01 H2.32
UPT1_RX_PA0: H1.49 H6.2 | length 749.5
  Top Layer w10: H6.2 6000,3527.01 6385,3912.01 H1.49
UPT1_TX_PA1: H1.50 H6.3 | length 749.5
  Top Layer w10: H6.3 6365,3692.01 6365,3792.01 6435,3862.01 6540,3862.01 H1.50
XCL: P1.6
XDA: P1.5

## Polygon pours and split planes (outlines as drawn)
GND on Top Layer (solid, remove dead copper, pour order 0): 3000,3000 6937.01,3000 6937.01,6937.01 3000,6937.01
GND on Inner1 (solid, remove dead copper): 3000,3000 6937.01,3000 6937.01,6937.01 3000,6937.01
GND on Inner2 (solid, remove dead copper): 3000,3000 6937.01,3000 6937.01,6937.01 3000,6937.01
GND on Bottom Layer (solid, remove dead copper, pour order 8): 3000,3000 6937.01,3000 6937.01,6937.01 3000,6937.01

## Keep-outs
Board Outline Layer:
  lines w10: 3000,3000 6937.01,3000 6937.01,6937.01 3000,6937.01 3000,3000
Multi-Layer:
  circle w10: c3880,6012.01 r78.74
  circle w10: c6060,6012.01 r78.74
  circle w10: c3880,3922.01 r78.74
  circle w10: c6060,3922.01 r78.74

## Silkscreen, mask and mechanical layers (free items; w line width, h text height)
Top Silkscreen Layer:
  text "5V" at 5168.73,6847.5 h30.66
  text "3.3V" at 5161.04,6747.5 h30.66
  text "GND" at 3077.38,6662.5 h30.66
  text "E0" at 3203.73,6662.5 h30.66
  text "B5" at 3298.73,6662.5 h30.66
  text "G11" at 3392.38,6662.5 h30.66
  text "D6" at 3498.73,6662.5 h30.66
  text "D0" at 3598.73,6662.5 h30.66
  text "A8" at 3698.73,6662.5 h30.66
  text "C9" at 3798.73,6662.5 h30.66
  text "G8" at 3898.73,6662.5 h30.66
  text "A11" at 3992.38,6662.5 h30.66
  text "G12" at 4157.38,6662.5 h30.66
  text "E1" at 4273.73,6662.5 h30.66
  text "B4" at 4368.73,6662.5 h30.66
  text "G10" at 4457.38,6662.5 h30.66
  text "D5" at 4568.73,6662.5 h30.66
  text "D1" at 4673.73,6662.5 h30.66
  text "A10" at 4757.38,6662.5 h30.66
  text "C6" at 4868.73,6662.5 h30.66
  text "G5" at 4968.73,6662.5 h30.66
  text "G13" at 3192.38,6612.5 h30.66
  text "B9" at 3298.73,6612.5 h30.66
  text "B3" at 3398.73,6612.5 h30.66
  text "G9" at 3498.73,6612.5 h30.66
  text "D4" at 3598.73,6612.5 h30.66
  text "C11" at 3692.38,6612.5 h30.66
  text "A9" at 3798.73,6612.5 h30.66
  text "C7" at 3898.73,6612.5 h30.66
  text "G6" at 3998.73,6612.5 h30.66
  text "G14" at 4157.38,6612.5 h30.66
  text "B8" at 4273.73,6612.5 h30.66
  text "G15" at 4367.38,6612.5 h30.66
  text "D7" at 4473.73,6612.5 h30.66
  text "D3" at 4568.73,6612.5 h30.66
  text "C10" at 4657.38,6612.5 h30.66
  text "C8" at 4768.73,6612.5 h30.66
  text "G7" at 4868.73,6612.5 h30.66
  text "A12" at 4957.38,6612.5 h30.66
  text "5V" at 5485.49,6411.02 h30.66
  text "GND" at 6122.38,6407.5 h30.66
  text "GND" at 4247.38,5657.5 h30.66
  text "5V" at 4258.73,5557.5 h30.66
  text "AUX" at 4237.38,5454.29 h30.66
  text "PD2" at 4242.38,5352.5 h30.66
  text "PC12" at 4228.25,5252.5 h30.66
  text "MD1" at 4237.38,5157.5 h30.66
  text "MD0" at 4237.38,5052.5 h30.66
  text "PF7" at 3517.38,5007.5 h30.66
  text "1" at 3705,5007.38 h30.88
  text "2" at 3700,4907.38 h30.88
  text "PB14" at 3516.04,4902.5 h30.66
  text "PF8" at 3517.38,4807.5 h30.66
  text "3" at 3700,4807.38 h30.88
  text "3.3V" at 4141.04,4802.5 h30.66
  text "PF9" at 3517.38,4702.5 h30.66
  text "4" at 3700,4702.38 h30.88
  text "GND" at 4147.38,4702.5 h30.66
  text "PB6" at 4147.38,4602.5 h30.66
  text "PB7" at 4147.38,4502.5 h30.66
  text "XDA" at 4142.38,4397.5 h30.66
  text "XCL" at 4142.38,4297.5 h30.66
  text "PE4" at 3292.38,4232.5 h30.66
  text "PC4" at 3417.38,4232.5 h30.66
  text "GND" at 4139.56,4203.87 h30.66
  text "PA6" at 3418.27,4133.39 h30.66
  text "PE5" at 3292.38,4132.5 h30.66
  text "INT" at 4142.38,4102.5 h30.66
  text "PE6" at 3292.38,4027.5 h30.66
  text "PA4" at 3417.38,4027.5 h30.66
  text "SDD" at 4167.38,3977.5 h30.66
  text "PA15" at 3291.04,3932.5 h30.66
  text "PC5" at 3417.38,3932.5 h30.66
  text "CSB" at 4167.38,3872.5 h30.66
  text "PC13" at 3291.04,3832.5 h30.66
  text "PB1" at 3422.38,3832.5 h30.66
  text "PF0" at 4167.38,3767.5 h30.66
  text "PF3" at 3292.38,3727.5 h30.66
  text "PF14" at 3416.04,3727.5 h30.66
  text "PF1" at 4167.38,3667.5 h30.66
  text "PF5" at 3292.38,3632.5 h30.66
  text "PC0" at 3417.38,3632.5 h30.66
  text "GND" at 4159.56,3573.87 h30.66
  text "PF2" at 3292.73,3532.85 h30.66
  text "PC2" at 3417.38,3532.5 h30.66
  text "GND" at 6154.56,3498.87 h30.66
  text "5V" at 5873.73,3497.5 h30.66
  text "PA0" at 5952.38,3497.5 h30.66
  text "PA1" at 6057.38,3497.5 h30.66
  text "3.3V" at 4156.04,3472.5 h30.66
  text "PF4" at 3292.11,3432.22 h30.66
  text "PE3" at 3417.38,3432.5 h30.66
  text "PF6" at 3292.38,3327.5 h30.66
  text "PE2" at 3417.38,3327.5 h30.66
  text "D10" at 3667.38,3282.5 h30.66
  text "B12" at 3767.38,3282.5 h30.66
  text "G3" at 3873.73,3282.5 h30.66
  text "C3" at 3973.73,3282.5 h30.66
  text "F13" at 4067.38,3282.5 h30.66
  text "E13" at 4172.38,3282.5 h30.66
  text "E9" at 4278.73,3282.5 h30.66
  text "G1" at 4373.73,3282.5 h30.66
  text "F11" at 4467.38,3282.5 h30.66
  text "A2" at 4573.73,3282.5 h30.66
  text "D11" at 4722.38,3282.5 h30.66
  text "B15" at 4827.38,3282.5 h30.66
  text "D14" at 4922.38,3282.5 h30.66
  text "G4" at 5033.73,3282.5 h30.66
  text "E14" at 5122.38,3282.5 h30.66
  text "E10" at 5222.38,3282.5 h30.66
  text "G0" at 5328.73,3282.5 h30.66
  text "B2" at 5428.73,3282.5 h30.66
  text "A5" at 5528.73,3282.5 h30.66
  text "B0" at 5633.73,3282.5 h30.66
  text "B13" at 4923.19,3232.54 h30.66
  text "D12" at 3667.38,3232.5 h30.66
  text "D8" at 3773.73,3232.5 h30.66
  text "D15" at 3867.38,3232.5 h30.66
  text "B11" at 3972.38,3232.5 h30.66
  text "F10" at 4067.38,3232.5 h30.66
  text "E15" at 4172.38,3232.5 h30.66
  text "E11" at 4272.38,3232.5 h30.66
  text "E8" at 4373.73,3232.5 h30.66
  text "F15" at 4467.38,3232.5 h30.66
  text "C1" at 4573.73,3232.5 h30.66
  text "D13" at 4722.38,3232.5 h30.66
  text "D9" at 4833.73,3232.5 h30.66
  text "G2" at 5033.73,3232.5 h30.66
  text "B10" at 5122.38,3232.5 h30.66
  text "E12" at 5222.38,3232.5 h30.66
  text "E7" at 5328.73,3232.5 h30.66
  text "F12" at 5417.38,3232.5 h30.66
  text "A7" at 5528.73,3232.5 h30.66
  text "A3" at 5628.73,3232.5 h30.66
Mechanical Layer:
  circle w1: c3880,6012.01 r78.74
  circle w1: c6060,6012.01 r78.74
  circle w1: c3880,3922.01 r78.74
  circle w1: c6060,3922.01 r78.74